# Altium PCB MAGI'sPicoPower.PcbDoc
Units mil, origin at the board's own origin, x right, y up, seen from the top; angles counter-clockwise.
Board outline 6000 x 4000 mil, 2 copper layers (Top Layer, Bottom Layer); 10 components, 7 nets, 60 pads, 10 vias.
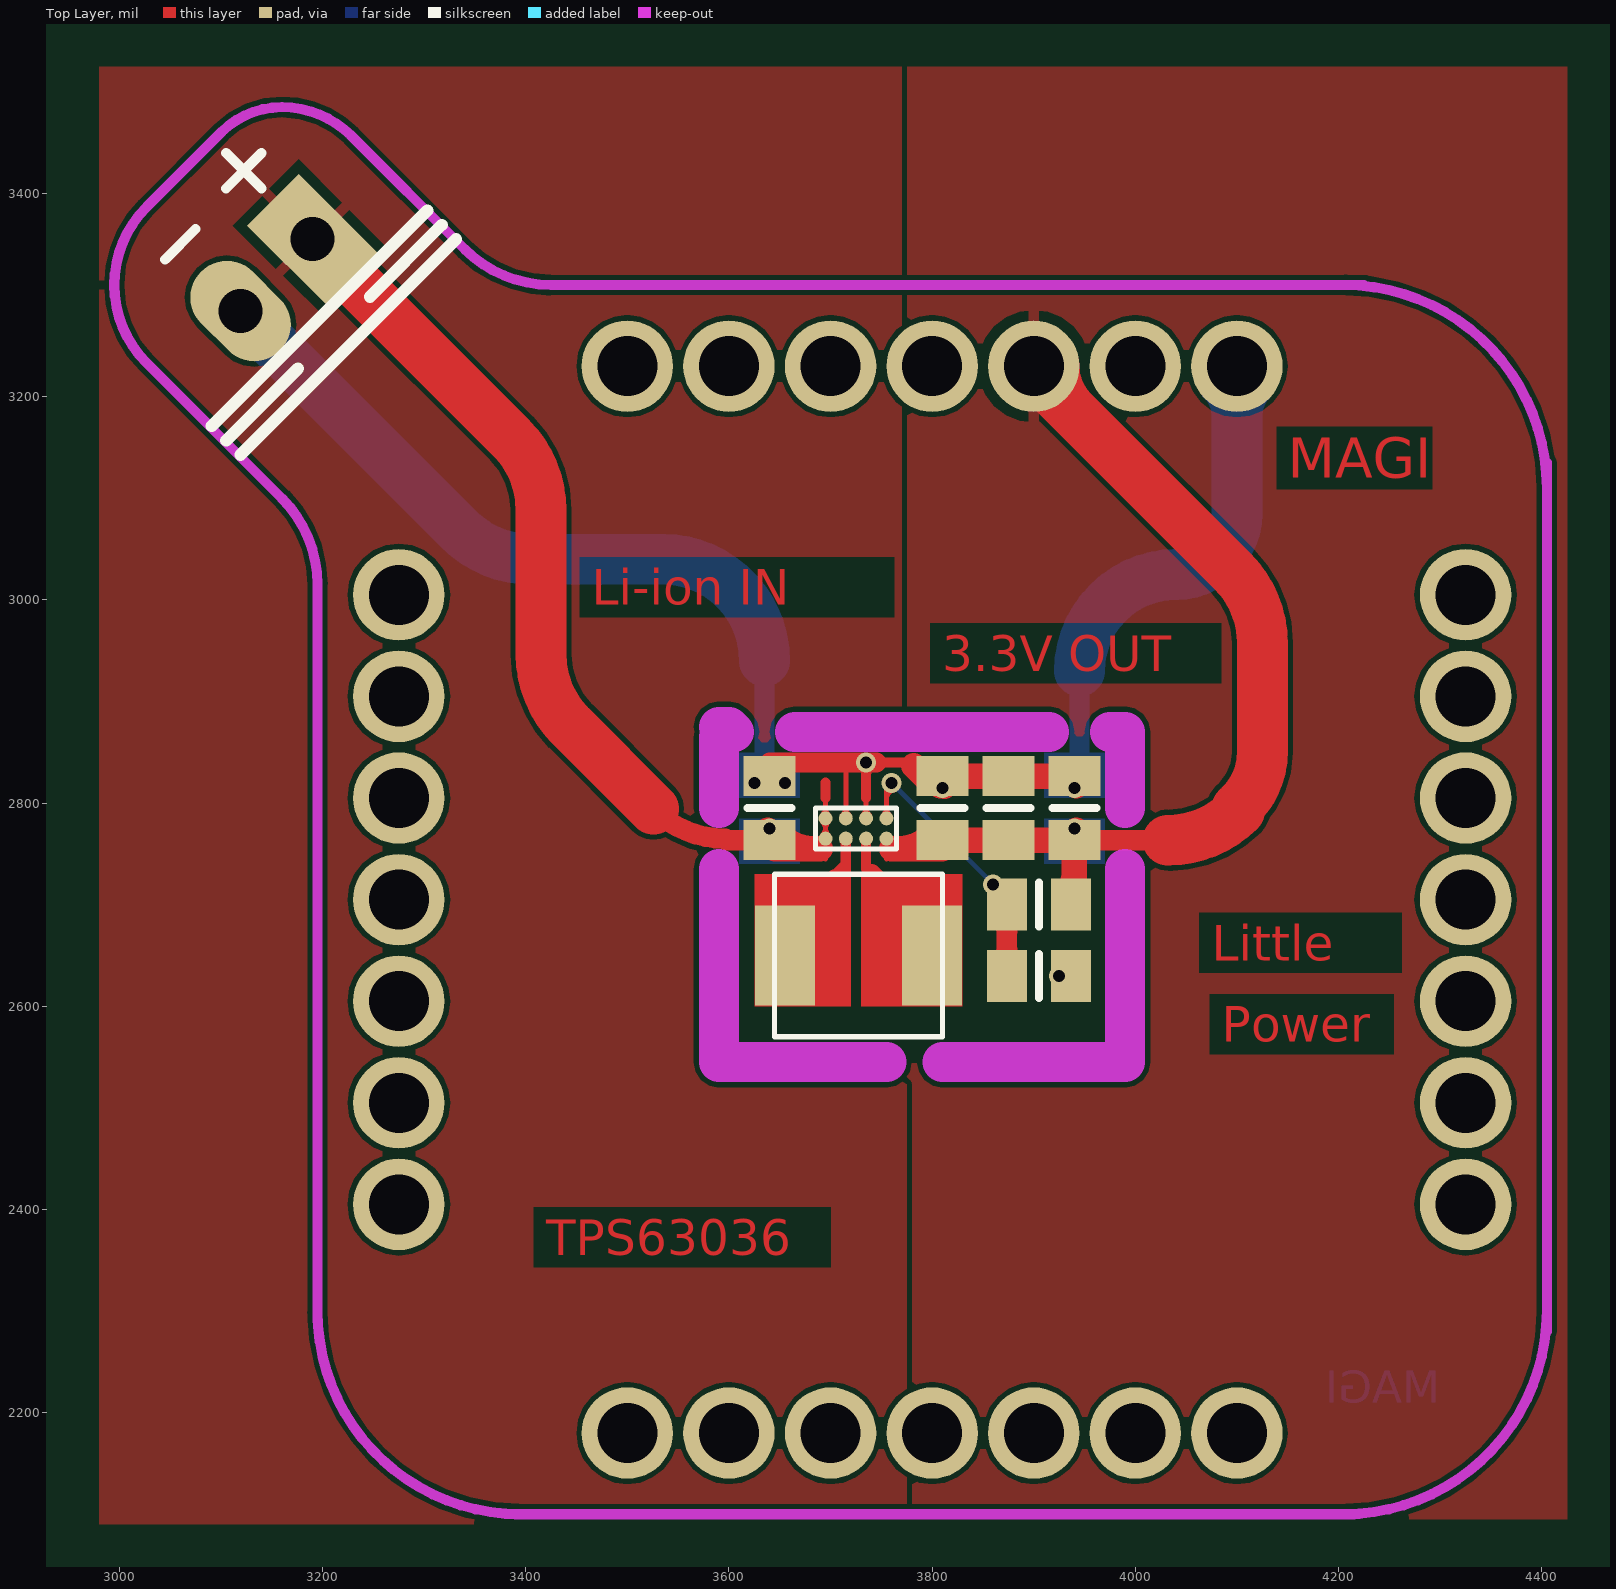
[diagram p0: Top Layer view]
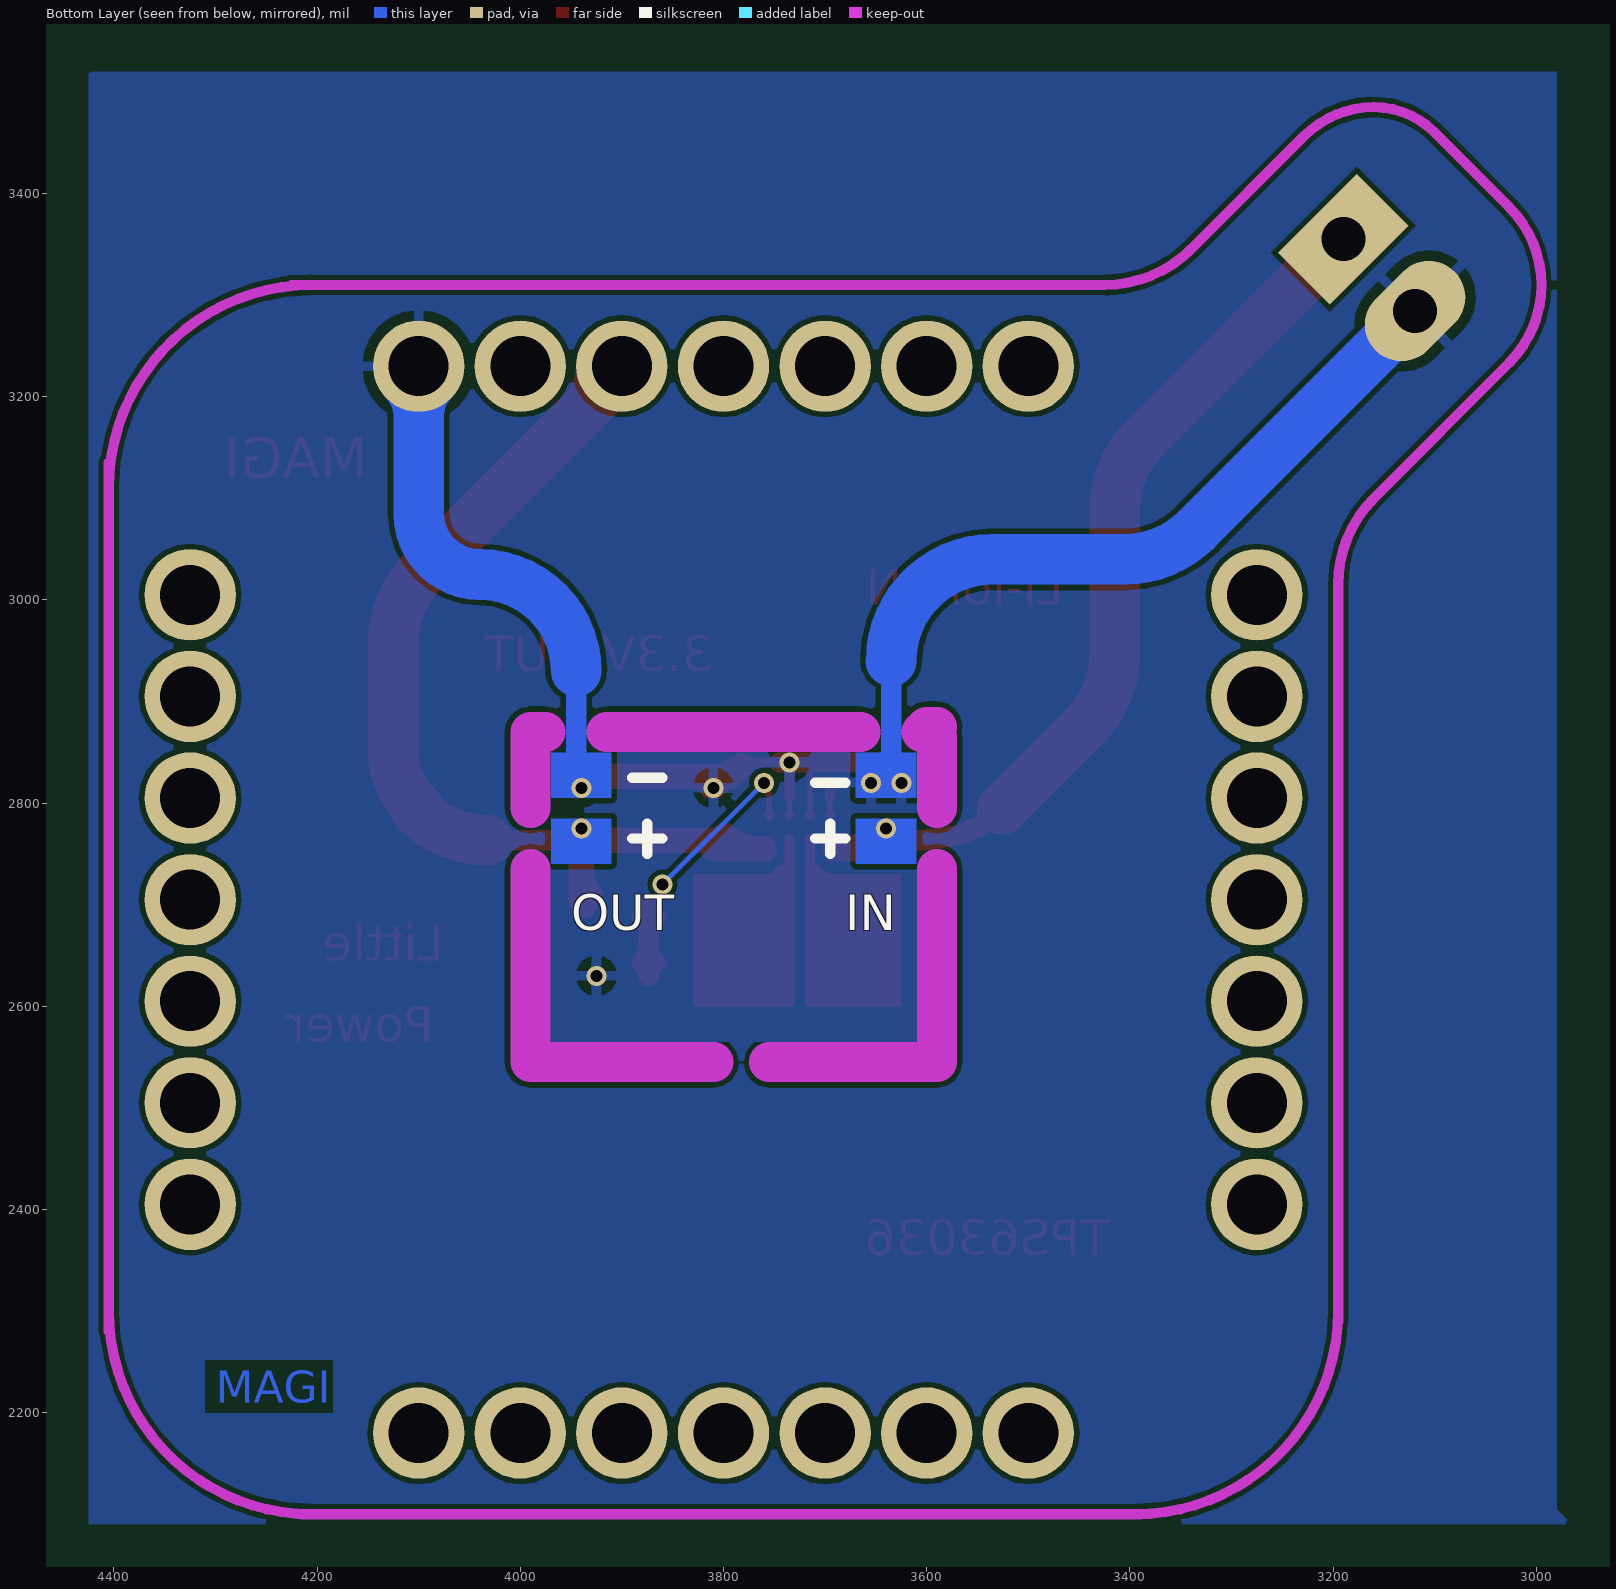
[diagram p1: Bottom Layer view, seen from below]

## Layer stack, top to bottom
Top Layer: signal copper 1.4
Dielectric: dielectric 12.6, FR-4, Dk 4.8
Bottom Layer: signal copper 1.4

## Board outline
1000,1000 7000,1000 7000,5000 1000,5000

## Design rules (kind name [scope] priority, off if disabled: settings)
Clearance [All] p1: gap=5
PolygonConnect [All] p1: connectstyle=Relief reliefconductorwidth=10 reliefentries=4 polygonreliefangle="90 Angle" airgapwidth=10
RoutingVias [All] p1: holewidth=28 width=50 viastyle="Through Hole" minholewidth=28 minwidth=50 maxholewidth=28 maxwidth=50
SolderMaskExpansion [All] p1: expansion=4
Width [All] p1: maxlimit=100 minlimit=5 preferedwidth=30
28 further rules are at their usual default settings.

## Classes and differential pairs
component class MAGIsPowerSave: C2 J1 L1 R3 R4 U1

## Components (designator, comment, footprint, x,y, rotation, side; value= is the part's Value field where it differs from the comment)
C1 "CAP_1" 6-0805_L 3810,2795 r270 top
C2 "CAP_1" 6-0805_L 3940,2795 r270 top
C3 "CAP_1" 6-0805_L 3875,2795 r270 top
C4 "CAP_1" 6-0805_L 3640,2795 r270 top
J1 "MAGI-M8" MAGI-M8 3800,2705 r0 top
L1 "INDUCTOR" 4*4 3725,2650 r180 top
R1 "287kΩ" 6-0805_L 3905,2630 r180 top
R2 "51.1kΩ" 6-0805_L 3905,2700 r180 top
U1 "TPS63036" WCSP-8 3725,2775 r0 top
? "Comment" CON2 3190,3355 r225 top

## Footprints (in the part's own frame and the unit in brackets; to place one, negate y for a bottom-side part, rotate by r counter-clockwise, add the part's x,y. Pads: shape width x height; smd on the part's side, far side on the other; paste and mask are expansions set on the pad)
4*4 [mm]
  rect 1.5x2.5 smd: 1(-1.905,0) 2(1.778,0)
  silkscreen extent -2.16,-2.03 2.03,2.03
6-0805_L [mm] "Chip Resistor, Body 2.0x1.2mm, IPC High Density"
  rect 1x1.3 smd: 1(-0.8,0) 2(0.8,0)
  silkscreen extent 0,-0.55 0,0.55, body extent -1.07,-0.7 1.07,0.7, height 0.7
CON2 [mil]
  rect 72x110 hole 43.31: 1(0,0)
  oval 72x110 hole 43.31: 2(100,0)
  silkscreen extent -100,60 200,100
MAGI-M8 [mil]
  round 90 hole 59.06: 1(300,525) 2(200,525) 3(100,525) 4(0,525) 5(-100,525) 6(-200,525) 7(-300,525) 8(-525,300) 9(-525,200) 10(-525,100) 11(-525,0) 12(-525,-100) 13(-525,-200) 14(-525,-300) 15(-300,-525) 16(-200,-525) 17(-100,-525) 18(0,-525) 19(100,-525) 20(200,-525) 21(300,-525) 22(525,-300) 23(525,-200) 24(525,-100) 25(525,0) 26(525,100) 27(525,200) 28(525,300)
  Keep-Out Layer lines w10: -605,-415 -605,290 ; -605,-405 ccw(c-405,-405) -405,-605 ; -410,-605 415,-605 ; -375,605 425,605 ; 405,-605 ccw(c405,-405) 605,-405 ; 405,605 cw(c405,405) 605,405 ; 605,-425 605,430
WCSP-8 [mil]
  round 13.78 smd: A1(-30,-10)
  round 8.86 on Top Solder: A1(-30,-10) A2(-30,10) B1(-10,-10) B2(-10,10) C1(10,-10) C2(10,10) D1(30,-10) D2(30,10)
  round 13.78 smd mask-6.89: A2(-30,10) B1(-10,-10) B2(-10,10) C1(10,-10) C2(10,10) D1(30,-10) D2(30,10)
  Top Layer lines w5: -30,-30 -30,-10 ; -30,10 -30,30 ; -10,-30 -10,-10 ; -10,10 -10,30 ; 10,10 10,30 ; 30,-30 30,-10 ; 30,10 30,30
  silkscreen extent -40,-20 40,20

## Part data
C1 C2 C3 C4: "Capacitor"
R1 R2: library part RES1

## Via types
v1: diameter 19.68, hole 11.81, Top Layer to Bottom Layer, 10 vias

## Nets (pads, with @x,y where several pads share a name; then routed paths per layer and width w, separated by ;. In a path a pad name is that pad's centre, name@x,y a point inside that pad or via, vN(x,y) a via of type N, cw(c..) or ccw(c..) an arc to the next point about the centre after c; other vN are vias at no path point)
GND: ?.2 C1.1 C2.1 C3.1 C4.1 J1.1 R1.1 U1.C2@3735,2785 | length 1850
  Top Layer w5: 3715,2820 3715,2840 ; U1.C2@3731.9,2788.1 ccw(c3724.4,2795.6) 3735,2795.6 ccw(c3745.6,2795.6) U1.C2@3738.1,2788.1
  Top Layer w10: v1@3731.58,2836.58 cw(c3723.31,2828.31) 3735,2828.31 cw(c3746.69,2828.31) v1@3738.42,2836.58 ; 3735,2805 v1(3735,2840) ; 3750,2840 3750.16,2839.84 3778.83,2839.84 ; 3781.83,2836.83 3778.83,2839.84 ; C1.1@3795.57,2838.45 cw(c3788.02,2849.03) 3778.83,2839.84
  Top Layer w20: C4.1 3640,2840 3715,2840 v1(3735,2840) 3744.87,2840
  Top Layer w25: 3781.83,2836.83 C1.1@3792.17,2826.5 ; C1.1@3808.12,2816.88 cw(c3831.34,2793.66) C1.1@3831.34,2826.5 ; C1.1@3812.12,2816.61 ccw(c3792.17,2801.44) C1.1@3792.17,2826.5 ; C2.1@3918.66,2826.5 cw(c3918.66,2793.66) C2.1@3941.88,2816.88 ; C2.1 C3.1 C1.1 C1.1@3792.17,2826.5
  Bottom Layer w20: v1@3625.06,2819.86 ccw(c3618.49,2835) 3635,2835 3635,2940 ; 3945,2835 3945,2930
  Bottom Layer w50: ?.2 3334.29,3069.29 ccw(c3405,3140) 3405,3040 3535,3040 cw(c3535,2940) 3635,2940 ; 3945,2930 cw(c4040,2930) 4040,3025 ccw(c4040,3085) 4100,3085 J1.1 ; J1.1@4085.86,3215.86 cw(c4051.72,3181.72) 4100,3181.72 cw(c4148.28,3181.72) J1.1@4114.14,3215.86
  other v1: 3925,2630 3810,2815 3940,2815 3625,2820 3655,2820
NetL1_1: L1.1 U1.C1@3735,2765 | length 179.8
  Top Layer w10: U1.C1@3735,2765 3735,2735 3740,2730
  Top Layer w20: 3740,2730 3785,2685 L1.1@3790,2685 ; 3766.44,2703.56 cw(c3732.57,2669.69) L1.1@3780.47,2669.69 ; 3767.2,2702.8 ccw(c3800,2735.6) L1.1@3800,2689.21
NetL1_2: L1.2 U1.B1@3715,2765 | length 234.1
  Top Layer w5: U1.B1@3711.9,2761.9 cw(c3704.4,2754.4) 3715,2754.4 cw(c3725.6,2754.4) U1.B1@3718.1,2761.9
  Top Layer w10: 3705,2725 3707.5,2727.5 ; 3705,2730 3715,2740 ; 3710,2725 3715,2730 3715,2740 ; U1.B1@3715,2765 3715,2745 3715,2740
  Top Layer w20: L1.2@3655,2689.21 ccw(c3655,2723.52) 3679.26,2699.26 ; L1.2@3660,2660 3660,2680 3705,2725 ; L1.2@3674.53,2669.69 cw(c3734.5,2669.69) 3692.09,2712.09
NetR1_2: R1.2 R2.2 U1.D2@3755,2785 | length 333.1
  Top Layer w5: U1.D2@3751.9,2788.1 ccw(c3744.4,2795.6) 3755,2795.6 ccw(c3765.6,2795.6) U1.D2@3758.1,2788.1 ; 3755,2804.19 cw(c3763.96,2804.19) v1@3761.78,2812.88 ; 3755,2805 v1@3755,2815 ; 3755,2810.59 cw(c3762.35,2810.59) v1@3760.57,2817.73
  Top Layer w20: R1.2@3866.66,2642.75 ccw(c3850.12,2659.29) 3873.5,2659.29 ccw(c3896.89,2659.29) R1.2@3880.35,2642.75 ; R2.2@3866.66,2687.25 cw(c3850.12,2670.71) 3873.5,2670.71 cw(c3896.89,2670.71) R2.2@3880.35,2687.25 ; R1.2 R2.2
  Bottom Layer w5: v1(3760,2820) v1(3860,2720)
NetR3_1: U1.B2@3715,2785 | length 31.6
  Top Layer w5: U1.B2@3711.9,2788.1 ccw(c3704.4,2795.6) 3715,2795.6 ccw(c3725.6,2795.6) U1.B2@3718.1,2788.1 ; 3715,2805 3715,2820
VCC: ?.1 C4.2 U1.A1@3695,2765 U1.A2@3695,2785 | length 1045.7
  Top Layer w5: U1.A1@3691.9,2761.9 cw(c3684.4,2754.4) 3695,2754.4 cw(c3705.6,2754.4) U1.A1@3698.1,2761.9 ; U1.A1@3691.9,2768.1 ccw(c3684.4,2775.6) 3695,2775.6 ccw(c3705.6,2775.6) U1.A1@3698.1,2768.1 ; U1.A2@3691.9,2781.9 cw(c3684.4,2774.4) 3695,2774.4 cw(c3705.6,2774.4) U1.A2@3698.1,2781.9 ; U1.A2@3691.9,2788.1 ccw(c3684.4,2795.6) 3695,2795.6 ccw(c3705.6,2795.6) U1.A2@3698.1,2788.1 ; U1.A1@3695,2765 U1.A2@3695,2785
  Top Layer w10: 3695,2805 3695,2820
  Top Layer w20: 3525.71,2794.29 ccw(c3596.42,2865) 3596.42,2765 ccw(c3597.92,2765) 3597.92,2763.5 C4.2
  Top Layer w25: C4.2@3638.12,2773.12 ccw(c3681.87,2816.87) 3681.87,2755 ; C4.2@3645,2755 3690,2755 ; C4.2@3650.99,2768.58 ccw(c3683.78,2801.38) 3683.78,2755
  Top Layer w50: ?.1 3385.71,3159.29 cw(c3315,3088.58) 3415,3088.58 3415,2946.42 ccw(c3515,2946.42) 3444.29,2875.71 3525.71,2794.29
  other v1: 3640,2775
VOUT: C1.2 C2.2 C3.2 J1.3 R2.1 U1.D1@3755,2765 | length 1101
  Top Layer w5: U1.D1@3751.9,2761.9 cw(c3744.4,2754.4) 3755,2754.4 cw(c3765.6,2754.4) U1.D1@3758.1,2761.9
  Top Layer w20: C2.2 4032.08,2763.5
  Top Layer w25: 3760,2755 C1.2@3810,2755 ; 3766.22,2755 ccw(c3766.22,2801.38) C1.2@3799.01,2768.58 ; C1.2 C3.2 C2.2 3940,2703.5 R2.1 ; C2.2@3918.66,2763.5 ccw(c3918.66,2796.34) C2.2@3941.88,2773.12 ; R2.1@3931.42,2710.99 ccw(c3910.69,2731.71) 3940,2731.71
  Top Layer w50: J1.3 ccw(c3914.64,3230) 3904.29,3219.64 4095.71,3028.22 cw(c4025,2957.51) 4125,2957.51 4125,2850 cw(c4052.57,2850) 4103.79,2798.79 4100,2795 cw(c4100,2793.58) 4101,2794.59 4102.79,2792.79 cw(c4032.08,2863.5) 4032.08,2763.5 ; J1.3@3920,3230 ccw(c3982.93,3230) 3938.43,3185.5
  other v1: 3940,2775
pads on no net: J1.2 J1.4 J1.5 J1.6 J1.7 J1.8 J1.9 J1.10 J1.11 J1.12 J1.13 J1.14 J1.15 J1.16 J1.17 J1.18 J1.19 J1.20 J1.21 J1.22 J1.23 J1.24 J1.25 J1.26 J1.27 J1.28 U1.A1@3695,2765 U1.A2@3695,2785 U1.B1@3715,2765 U1.B2@3715,2785 U1.C1@3735,2765 U1.C2@3735,2785 U1.D1@3755,2765 U1.D2@3755,2785

## Polygon pours and split planes (outlines as drawn)
GND on Bottom Layer "Keep-Out Layer-No Net" (solid, pour order 4): 4425,3325 4425,2090 2965,2090 2980,2105 2980,3520 4420,3520 4425,3525
GND on Bottom Layer "Keep-Out Layer-No Net" (solid, pour order 2): 3610,2850 3610,2565 3970,2565 3970,2850
VOUT on Top Layer "Keep-Out Layer-No Net" (solid, pour order 8): 3770,3525 3770,2865.2 3770.2,2865 3980,2865 3980,2560 3985,2555 3978.67,2548.67 3775,2548.67 3775,2110.2 3790.2,2095 4425,2095 4425,3525
VCC on Top Layer "Keep-Out Layer-No Net" (solid, pour order 6): 2980,3525 3770,3525 3770,2865 3765,2860 3600,2860 3600,2550 3775,2550 3775,2095 3770,2090 2980,2090

## Keep-outs
Keep-Out Layer:
  lines w10: 3195,2975 3195,3015 ccw(c3074.29,3015) 3159.64,3100.36 3026.82,3233.18 cw(c3103.64,3310) 2995,3310 cw(c3103.64,3310) 3026.82,3386.82 3100.25,3460.25 cw(c3160,3400.5) 3160,3485 cw(c3160,3388.43) 3228.28,3456.72 3339.64,3345.36 ccw(c3425,3430.71) 3425,3310 3430,3310
  lines w39.37: 3590,2735 3590,2545 3755,2545 ; 3590,2795 3590,2865 ; 3590,2875 3600,2875 3605,2870 ; 3665,2870 3915,2870 ; 3810,2545 3990,2545 3990,2735 ; 3975,2870 3990,2870 3990,2795

## Other copper
Top Layer:
  rectangle net NetL1_1: 3730,2600 3830,2730
  rectangle net NetL1_2: 3625,2600 3720,2730
  text "MAGI" at 4150,3120 h39.37
  text "Li-ion IN" at 3465,2995 h35
  text "3.3V OUT" at 3810,2930 h35
  text "Little" at 4075,2645 h35
  text "Power" at 4085,2565 h35
  text "TPS63036" at 3420,2355 h35
Bottom Layer:
  rectangle net VOUT: 3910,2740 3970,2785
  rectangle net GND: 3910,2805 3970,2850
  rectangle net GND: 3610,2805 3670,2850
  rectangle net VCC: 3610,2740 3670,2785
  text "MAGI" at 4300,2210 h31.5

## Silkscreen, mask and mechanical layers (free items; w line width, h text height)
Top Overlay:
  lines w10: 3045,3335 3075,3365 ; 3105,3405 3140,3440 ; 3105,3440 3140,3405
Bottom Overlay:
  lines w10: 3680,2765 3710,2765 ; 3680,2820 3710,2820 ; 3695,2750 3695,2780 ; 3860,2765 3890,2765 ; 3860,2825 3890,2825 ; 3875,2750 3875,2780
  text "IN" at 3680,2675 h35
  text "OUT" at 3950,2675 h35
Top Solder:
  region: 3720,2805 3720,2835 3705,2835 3705,2805
  rectangle: 3690,2805 3720,2820
Bottom Solder:
  rectangle: 3910,2740 3970,2785
  rectangle: 3910,2805 3970,2850
  rectangle: 3610,2740 3670,2785
  rectangle: 3610,2805 3670,2850